# Altium PCB clock_controller.PcbDoc
Units mil, origin at the board's own origin, x right, y up, seen from the top; angles counter-clockwise.
Board outline 1506.14 x 1976.53 mil, 2 copper layers (Top Layer, Bottom Layer); 48 components, 34 nets, 156 pads, 34 vias.
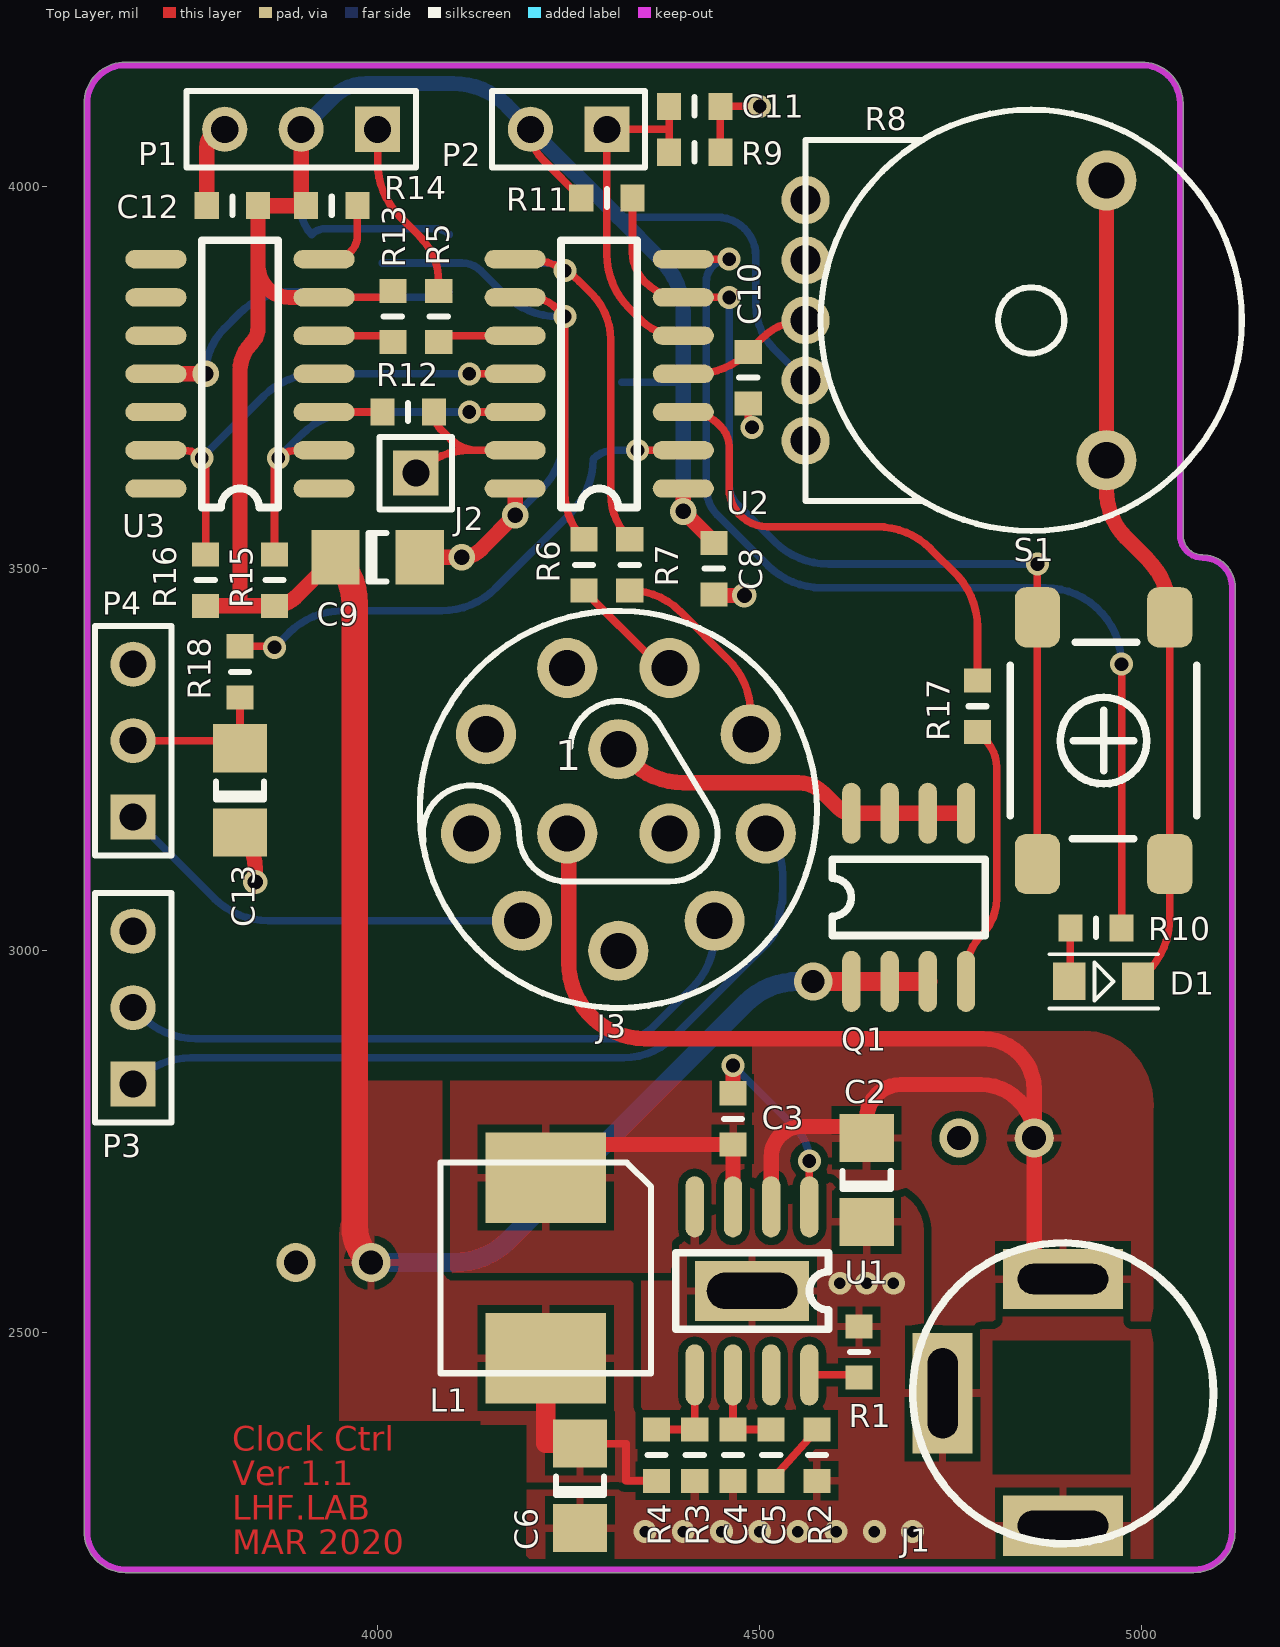
[diagram p0: Top Layer view]
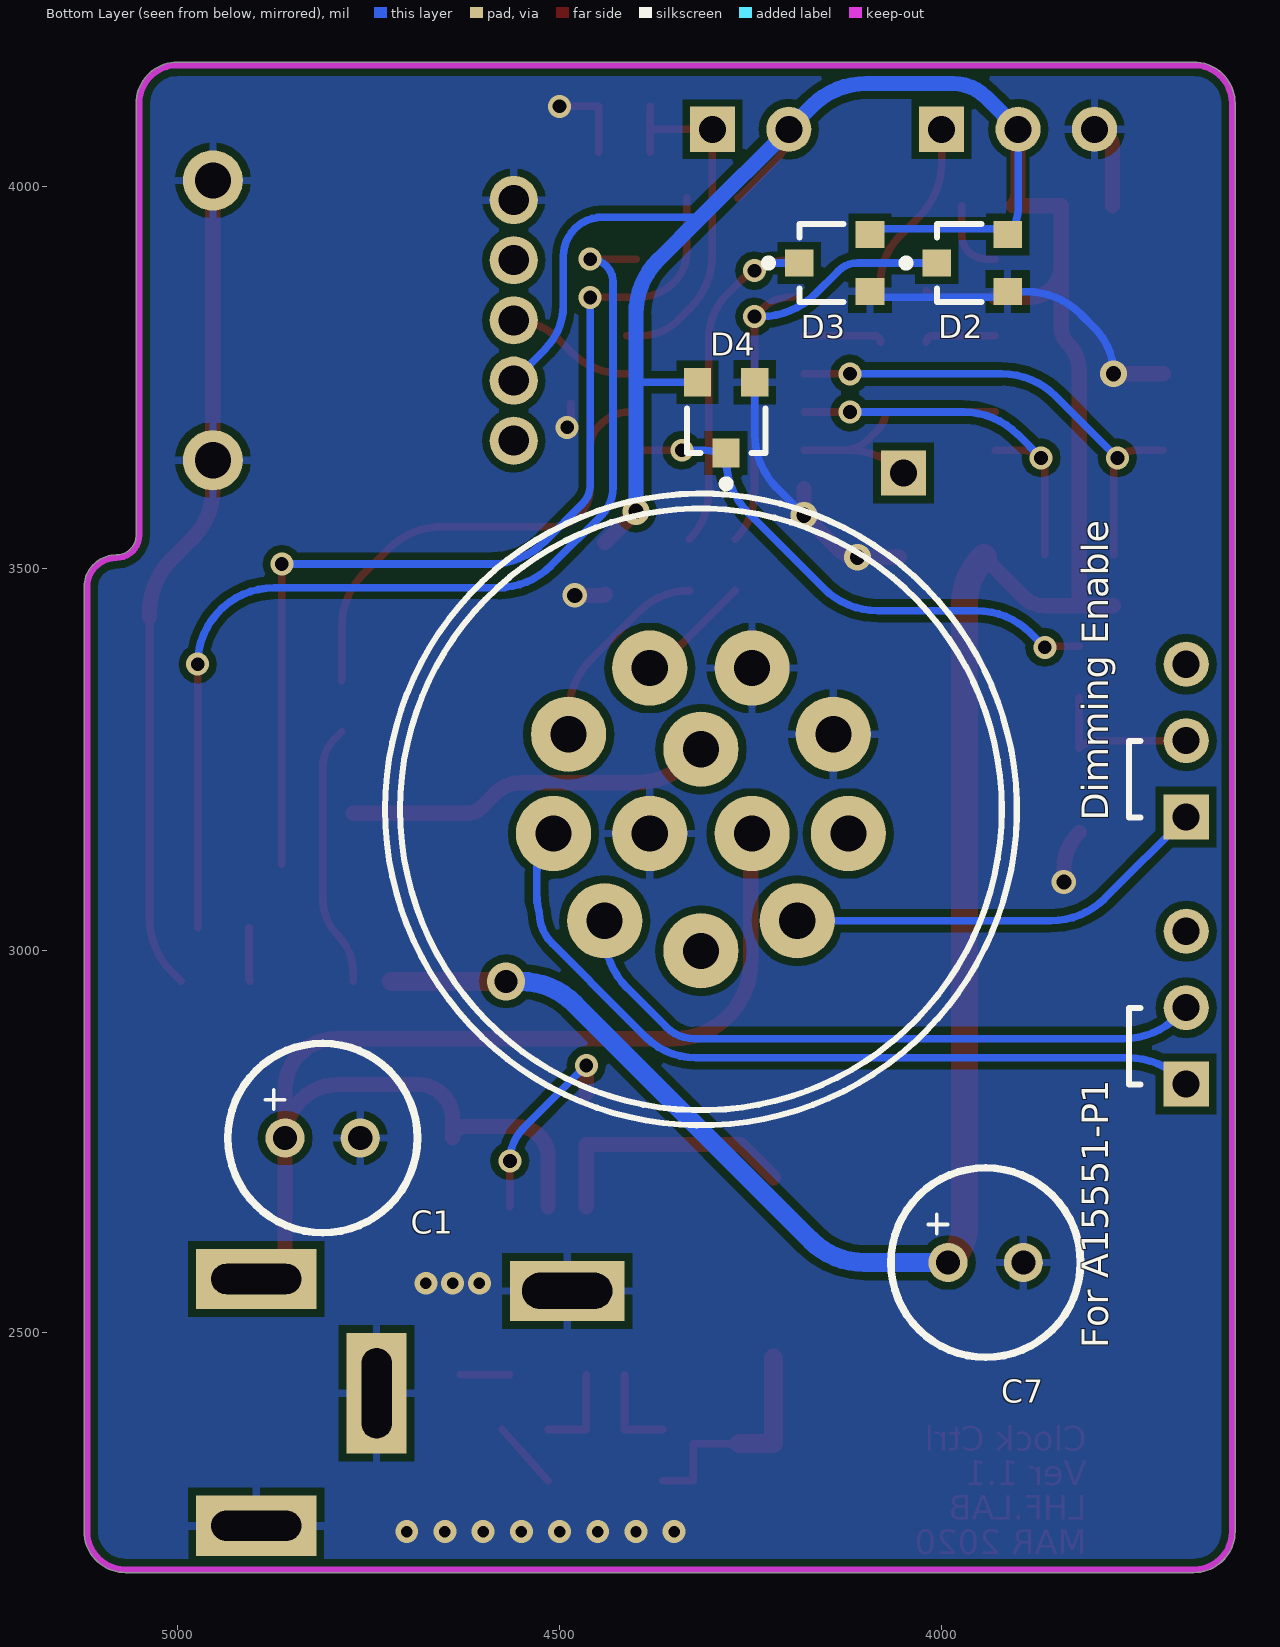
[diagram p1: Bottom Layer view, seen from below]

## Layer stack, top to bottom
Top Layer: signal copper 1.4
Dielectric: dielectric 12.6, FR-4, Dk 4.8
Bottom Layer: signal copper 1.4

## Board outline
3615.99,2240.35 cw(c3620,2240.35) 3616.14,2241.47 3616.14,4107.74 cw(c3620,4108.86) 3615.99,4108.86 cw(c3670,4108.86) 3670,4162.87 5000,4162.87 cw(c5000,4108.86) 5054.02,4108.86 5054.02,3544.06 ccw(c5080,3544.06) 5080,3518.07 cw(c5080,3475.94) 5122.13,3475.94 5122.13,2240.35 cw(c5068.11,2240.35) 5068.11,2186.34 3670,2186.34 cw(c3670,2240.35)

## Design rules (kind name [scope] priority, off if disabled: settings)
Clearance [All] p1: gap=10
HoleSize [All] p1: absolutevalues=TRUE maxlimit=200 minlimit=1 maxpercent=80.000 minpercent=20.000
MinimumSolderMaskSliver [All] p1: minsoldermaskwidth=5
PolygonConnect [All vs IsVia] p1: connectstyle=Direct reliefconductorwidth=10 reliefentries=4 polygonreliefangle="90 Angle"
PolygonConnect PolygonConnect_1 [All] p2: connectstyle=Relief reliefconductorwidth=10 reliefentries=4 polygonreliefangle="90 Angle"
RoutingVias [All] p1: holewidth=20 width=30 viastyle="Through Hole" minholewidth=14 minwidth=24 maxholewidth=100 maxwidth=100
SilkToSilkClearance [All] p1 off: silktosilkclearance=10
SilkscreenOverComponentPads [All] p1 off: minsilkscreentomaskgap=10
SolderMaskExpansion [All] p1: expansion=4
Width [All] p1: maxlimit=100 minlimit=6 preferedwidth=10 minimp=50.000000 maximp=50.000000 favimp=50.000000
24 further rules are at their usual default settings.

## Components (designator, comment, footprint, x,y, rotation, side; value= is the part's Value field where it differs from the comment)
C1 "100uF 35V" C6380POL 4810,2755 r180 bottom
C2 "10uF X5R 50V" C1206 4640,2700 r90 top
C3 "100nF" C0603 4465,2780 r270 top
C4 "1nF" C0603 4465,2340 r90 top
C5 "100nF" C0603 4515,2340 r270 top
C6 "10uF X5R 50V" C1206 4265,2300 r90 top
C7 "100uF 35V" C6380POL 3942.36,2592.05 r180 bottom
C8 "100nF" C0603 4440,3500 r270 top
C9 "10uF" C1206 4000,3515 r0 top
C10 "100nF" C0603 4485,3750 r90 top
C11 "100nF" C0603 4415,4105 r180 top
C12 "100nF" C0603 3810,3975 r180 top
C13 "10uF" C1206 3820,3210 r90 top
D1 "Yellow" LED0805 4905,2960 r0 top
D2 "BAV99" SOT23 3960,3900 r90 bottom
D3 "BAV99" SOT23 4140,3900 r90 bottom
D4 "BAV99" SOT23 4282,3697.68 r0 bottom
J1 "DC025" DC025M 4896.89,2420.95 r0 top
J2 "Socket" PIN1 4050,3625 r0 top
J3 "Connector" MS27034H12B12PN 4315,3185 r0 top locked
L1 "10uH 0630密封电感" Inductor0630 4220,2585 r270 top
P1 "Header 3" HDR1X3 4000,4075 r180 top
P2 "Light Sensor" HDR1X2 4300,4075 r180 top
P3 "Header 3" HDR1X3 3680,2825.61 r90 top
P4 "Header 3" HDR1X3 3680,3175 r90 top
Q1 "FDS6679" SO-8 4695,3070 r90 top
R1 "100K" R0603 4630,2475 r270 top
R2 "1K" R0603 4575,2340 r90 top
R3 "10K" R0603 4415,2340 r90 top
R4 "51K" R0603 4365,2340 r90 top
R5 "300R" R0603 4080,3830 r90 top
R6 "1K" R0603 4270,3505 r270 top
R7 "1K" R0603 4330,3505 r270 top
R8 "10K" RK10J 4560,3825 r270 top
R9 "10K" R0603 4415,4045 r0 top
R10 "1K" R0603 4940,3030 r180 top
R11 "10K" R0603 4300,3985 r180 top
R12 "300R" R0603 4040,3705 r180 top
R13 "1K" R0603 4020,3830 r270 top
R14 "1K" R0603 3940,3975 r0 top
R15 "4K7" R0603 3865,3485 r270 top
R16 "4K7" R0603 3775,3485 r270 top
R17 "1K" R0603 4785,3320 r270 top
R18 "1K" R0603 3820,3365 r90 top
S1 "SW-PB" BUTTON_SMT 4950,3275 r0 top
U1 "TPS54335" SO-8-THERMAL 4490,2555 r270 top
U2 "ATTiny214" SO-14 4400,3605 r180 top
U3 "RX8025" SO-14 3930,3605 r180 top

## Footprints (in the part's own frame and the unit in brackets; to place one, negate y for a bottom-side part, rotate by r counter-clockwise, add the part's x,y. Pads: shape width x height; smd on the part's side, far side on the other; paste and mask are expansions set on the pad)
BUTTON_SMT [mm]
  rrect50% 1.5x2 smd: 1(-2.2,-4.1) 1(-2.2,4.1) 2(2.2,-4.1) 2(2.2,4.1)
  silkscreen extent -3.1,-3.26 3.1,3.27, body extent -3.1,-3.5 3,3.5, height 7.5
C0603 [mm] "Chip Capacitor, Body 1.6x0.8mm, IPC High Density"
  rect 0.8x0.9 smd: 1(-0.852,0) 2(0.852,0)
  silkscreen extent 0,-0.3 0,0.3, body extent -1.03,-0.5 1.02,0.45, height 0.76
C1206 [mm] "Chip Capacitor; Body 3.2 x 1.6 mm (LxW typ)"
  rect 1.6x1.8 smd: 1(-1.4,0) 2(1.4,0)
  silkscreen extent -0.3,-0.8 0.3,0.8, body extent -1.52,-0.81 1.52,0.81, height 1.55
C6380POL [mm]
  round 1.3 hole 0.8: 1(-1.25,0) 2(1.25,0)
  silkscreen extent -3.15,-3.15 3.15,3.15, body extent -3.13,-3.14 3.15,3.14, height 8
DC025M [mm] "DC025M 2.1mm?"
  rect 4x2 hole 1 slot 3 at 0 deg: 1(0,3.8) 2(0,-4.4)
  rect 2x4 hole 1 slot 3 at 90 deg: 3(-4,0)
  silkscreen extent -5,-5 5,5, body extent -5.4,-5.4 5.4,5.4, height 15.1
HDR1X2 [mm] "Connector; Header; 2 Position"
  rect 1.5x1.5 hole 0.9: 1(0,0)
  round 1.5 hole 0.9: 2(2.54,0)
  silkscreen extent -1.27,-1.27 3.81,1.27
HDR1X3 [mm] "Connector; Header; 3 Position"
  rect 1.5x1.5 hole 0.9: 1(0,0)
  round 1.5 hole 0.9: 2(2.54,0) 3(5.08,0)
  silkscreen extent -1.27,-1.27 6.35,1.27
Inductor0630 [mm]
  rect 3x4 smd: 1(-3,0) 2(3,0)
  silkscreen extent -3.5,-3.5 3.5,3.5, body extent -3.8,-3.51 3.8,3.51, height 3
LED0805 [mm]
  rect 1.07x1.24 smd: 1(0,0) 2(2.286,0)
  silkscreen extent -0.66,-0.9 2.95,0.9
MS27034H12B12PN [mm]
  round 2 / inner round 2.5 / far side round 2.5 hole 1.2: 1(0,2) 2(1.7,-0.8) 3(-1.7,-0.8) 4(-4.4,2.5) 5(-1.7,4.7) 6(1.7,4.7) 7(4.4,2.5) 8(4.9,-0.8) 9(3.2,-3.7) 10(0,-4.7) 11(-3.2,-3.7) 12(-4.9,-0.8)
  silkscreen extent -6.6,-6.6 6.6,6.6
PIN1 [mm] "Connector; Plug"
  rect 1.5x1.5 hole 0.9: 1(0,0)
  silkscreen extent -1.2,-1.2 1.2,1.2
R0603 [mm] "Chip Resistor, Body 1.6x0.8mm, IPC High Density"
  rect 0.8x0.9 smd: 1(0.852,0) 2(-0.852,0)
  silkscreen extent 0,-0.3 0,0.3, body extent -1.03,-0.5 1.02,0.45, height 0.76
RK10J [mm]
  round 1.6 hole 1: 1(-4,0) 2(-2,0) 3(0,0) 4(2,0) 5(4,0)
  round 2 hole 1.2: 6(-4.65,10) 7(4.65,10)
  silkscreen extent -7,0 7,14.5
SO-8 [mil]
  oval 80x24 smd: 1(-110,75) 2(-110,25) 3(-110,-25) 4(-110,-75) 5(110,-75) 6(110,-25) 7(110,25) 8(110,75)
  silkscreen extent -50,-100 50,100, body extent -79,-98 79,98, height 67
SO-8-THERMAL [mil]
  rect 78.74x149.61 hole 47.24 slot 118.11 at 90 deg: 0(0,0)
  oval 80x24 smd: 1(-110,75) 2(-110,25) 3(-110,-25) 4(-110,-75) 5(110,-75) 6(110,-25) 7(110,25) 8(110,75)
  silkscreen extent -50,-100 50,100, body extent -79,-98 79,98, height 67
SO-14 [mil]
  oval 80x24 smd: 1(0,0) 2(0,-50) 3(0,-100) 4(0,-150) 5(0,-200) 6(0,-250) 7(0,-300) 8(220,-300) 9(220,-250) 10(220,-200) 11(220,-150) 12(220,-100) 13(220,-50) 14(220,0)
  silkscreen extent 60,-325 160,25, body extent 21,-336 191,34, height 104
SOT23 [mm]
  rect 0.9x0.95 smd: 1(0,1.175) 2(0.95,-1.175) 3(-0.95,-1.175)
  silkscreen extent -1.3,-0.3 1.3,2.33

## Part data
C1 C7: library part "Cap Pol2", "Polarized Capacitor (Axial)"
C2 C3 C4 C5 C6 C8 C9 C10 C11 C12 C13: library part Cap, "Capacitor"
D1: library part LED0, "Typical INFRARED GaAs LED"
D2 D3 D4: "SOT23 Silicon Planar High-Speed Switching Series Diode Pair"
J1: "CON,PWR2.5 DC025M 2.1mmо"
J3: library part CON_MS27034H12B12PN
L1: library part Inductor, "Inductor"
P1 P3 P4: "Header, 3-Pin"
P2: library part "Header 2", "Header, 2-Pin"
R1 R2 R3 R4 R5 R6 R7 R9 R10 R11 R12 R13 R14 R15 R16 R17 R18: library part Res2, "Resistor"
R8: library part RK10J, "Square Trimming Potentiometer"
S1: "Switch"
U3: library part RX8025T

## Via types
v1: diameter 30, hole 18, Top Layer to Bottom Layer, tented both sides, 16 vias
v2: diameter 30, hole 15, Top Layer to Bottom Layer, tented both sides, 11 vias
v3: diameter 35, hole 20, Top Layer to Bottom Layer, tented both sides, 4 vias
v4: diameter 32, hole 20, Top Layer to Bottom Layer, tented both sides, 2 vias
v5: diameter 50, hole 30, Top Layer to Bottom Layer, tented both sides, 1 vias

## Nets (pads, with @x,y where several pads share a name; then routed paths per layer and width w, separated by ;. In a path a pad name is that pad's centre, name@x,y a point inside that pad or via, vN(x,y) a via of type N, cw(c..) or ccw(c..) an arc to the next point about the centre after c; other vN are vias at no path point)
AIN1: C10.2 R8.3 U2.4 | length 181.3
  Top Layer w10: U2.4 4416.09,3755 ccw(c4416.09,3852.45) C10.2 4502.74,3801.28 cw(c4560,3744.02) R8.3
AIN2: C11.2 P2.1 R9.2 U2.5 | length 477.9
  Top Layer w10: R9.2@4381.46,4045.02 4381.46,4075 ; C11.2 4381.46,4075 ; U2.5@4411.72,3805 U2.5 4393.28,3805 cw(c4393.28,3873.28) 4345,3825 4329.29,3840.71 cw(c4400,3911.42) 4300,3911.42 P2.1 4381.46,4075
CHR_RELAY: J3.9 P3.2 | length 865.1
  Bottom Layer w10: P3.2 3691.32,2914.29 ccw(c3762.03,2985) 3762.03,2885 4323.79,2885 ccw(c4323.79,2936.21) 4359.99,2899.99 4411.69,2951.7 ccw(c4340.98,3022.41) 4440.98,3022.41 J3.9
CHR_SW: J3.8 P3.1 | length 1068.2
  Bottom Layer w10: P3.1 3685.1,2830.71 cw(c3755.81,2760) 3755.81,2860 4321.72,2860 ccw(c4321.72,2952.43) 4387.07,2887.07 4410,2910 4509.59,3009.59 ccw(c4468.88,3050.3) 4526.45,3050.3 ccw(c4439.39,3074.86) 4529.85,3074.86 ccw(c4445.32,3079.88) 4530,3079.88 ; J3.8 cw(c4454.59,3100.18) 4530,3100.18 4530,3079.88 ; 4530,3063.86 4530,3079.88
DIMMING: J3.11 P4.1 | length 560.9
  Bottom Layer w10: P4.1 3786.38,3068.62 ccw(c3857.09,3139.33) 3857.09,3039.33 J3.11
F_32768: J2.1 R12.2 U2.13 | length 218.7
  Top Layer w10: J2.1@4050.71,3625.71 cw(c4121.42,3555) 4121.42,3655 4130,3655 ; R12.2 ccw(c4106.29,3705) 4083.15,3681.85 4095.86,3669.14 ccw(c4130,3703.28) 4130,3655 ; U2.13 4130,3655
GND: C1.2 C2.1 C4.1 C6.1 C7.2 C8.2 C9.2 C10.1 C11.1 C12.2 C13.1 D1.2 D2.3 D3.3 D4.3 J1.2 J1.3 J3.2 J3.4 J3.5 P1.3 R1.2 R2.2 R3.2 R8.1 R8.6 R8.7 R9.1 S1.2 U1.0 U1.4 U2.14 U3.11 | length 2277.9
  Top Layer w10: R9.1 4448.54,4104.98 v1(4500,4105) ; C10.1 4485,3697.07 ccw(c4502.07,3697.07) v1(4490,3685) ; D1.2 5007.32,2972.32 ccw(c4936.61,3043.04) 5036.61,3043.04 5036.61,3113.58 S1.2@5036.61,3436.42
  Top Layer w20: U3.11 v3(3775,3755) ; C12.2 3776.46,4051.46 cw(c3800,4051.46) P1.3 ; C13.1 cw(c3771.72,3106.6) 3840,3106.6 v4(3840,3090) ; C9.2 v3(4110,3515) ccw(c4110,3551.21) 4135.61,3525.61 v3(4180,3570) U2.14 ; C8.2 ccw(c4443.52,3469.97) 4443.52,3465 v4(4480,3465) ; R8.6 R8.7 4953.7,3603.49 ccw(c5043.49,3603.49) 4980,3540 5007.32,3512.68 cw(c4936.61,3441.96) 5036.61,3441.96 S1.2@5036.61,3436.42
  Bottom Layer w10: v3(3775,3755) cw(c3859.5,3755) 3799.75,3814.75 3818.31,3833.31 cw(c3889.02,3762.6) 3889.02,3862.6 D2.3 ccw(c3932.08,3880.94) 3932.08,3855 4075.4,3855 ccw(c4075.4,3880.94) D3.3 ; v3(4180,3570) 4215.31,3605.31 ccw(c4144.6,3676.02) 4244.6,3676.02 D4.3
  other v2: 4350,2240 4400,2240 4450,2240 4500,2240 4550,2240 4600,2240 4650,2240 4700,2240 4605,2565 4640,2565 4675,2565
KEY: R11.2 S1.1 U2.6 | length 1323.4
  Top Layer w10: R11.2 4333.56,3914.69 ccw(c4389.69,3914.69) 4350,3875 ccw(c4398.28,3923.28) 4398.28,3855 U2.6 ; U2.6@4393.28,3855 U2.6 ; v1(4460,3855) U2.6 ; S1.1@4863.39,3113.58 4863.39,3436.42 v1(4863.39,3506.1)
  Bottom Layer w10: v1(4460,3855) 4460,3609.14 ccw(c4494.14,3609.14) 4470,3585 4519.61,3535.39 ccw(c4590.32,3606.1) 4590.32,3506.1 v1(4863.39,3506.1)
LAMP+: J3.1 Q1.5 Q1.6 Q1.7 Q1.8 | length 482.3
  Top Layer w20: J3.1 4329.45,3249.29 ccw(c4400.16,3320) 4400.16,3220 4550,3220 cw(c4550,3171.72) 4584.14,3205.86 4602.93,3187.07 ccw(c4620,3204.14) Q1.8 Q1.6 Q1.5
LED: R10.2 U2.7 | length 1381.8
  Top Layer w10: U2.7 v1(4460,3905) ; R10.2 v1(4973.56,3375.02)
  Bottom Layer w10: v1(4460,3905) ccw(c4460,3875) 4430,3875 4430,3606.21 ccw(c4481.21,3606.21) 4444.99,3570.01 4510.71,3504.29 ccw(c4581.42,3575) 4581.42,3475 4586.42,3475 4873.58,3475 cw(c4873.58,3375.02) v1(4973.56,3375.02)
NetC3_1: C3.1 U1.1 | length 260.3
  Top Layer w10: U1.1 v1(4565,2725)
  Top Layer w20: C3.1 v1(4465,2850)
  Bottom Layer w10: v1(4465,2850) 4547.32,2767.68 cw(c4504.64,2725) 4556.5,2755.89 cw(c4504.64,2725) v1(4565,2725)
NetC3_2: C3.2 L1.1 U1.3 | length 344.4
  Top Layer w20: L1.1 4263.35,2746.46 C3.2 U1.3
NetC4_2: C4.2 C5.1 U1.6 | length 121.5
  Top Layer w10: U1.6 C4.2 C5.1@4514.98,2373.54
NetC5_2: C5.2 R2.1 | length 90
  Top Layer w10: C5.2 R2.1
NetC13_2: C13.2 P4.2 R18.2 | length 209
  Top Layer w10: P4.2 3796.14,3275 cw(c3796.14,3241.26) C13.2 R18.2
NetD1_1: D1.1 R10.1 | length 70.4
  Top Layer w10: D1.1 ccw(c4901.48,2963.52) 4906.46,2963.52 R10.1
NetQ1_4: Q1.4 R17.1 | length 345.3
  Top Layer w10: Q1.4 4770,2971.72 cw(c4838.28,2971.72) 4790,3020 ccw(c4741.72,3068.28) 4810,3068.28 4810,3240 ccw(c4758.2,3240) 4794.83,3276.63 R17.1
NetR1_1: R1.1 U1.8 | length 65
  Top Layer w10: U1.8 R1.1@4630,2445
NetR3_1: R3.1 R4.1 U1.5 | length 121.5
  Top Layer w10: R4.1 R3.1 U1.5
NetR5_2: R5.2 U2.10 | length 104.9
  Top Layer w10: R5.2 cw(c4088.56,3796.44) 4088.56,3805 U2.10
NetR12_1: R12.1 U3.3 | length 76.5
  Top Layer w10: U3.3 R12.1
NetR13_1: R13.1 U3.5 | length 94.9
  Top Layer w10: U3.5 4011.46,3805 cw(c4011.46,3796.46) R13.1
NetR14_1: R14.1 U3.7 | length 100
  Top Layer w10: U3.7 3940.86,3905 ccw(c3940.86,3939.14) 3965,3915 ccw(c3944.37,3935.63) 3973.54,3935.63 R14.1
PHA: J3.6 R6.1 | length 189
  Top Layer w10: R6.1 J3.6@4363.98,3377.47 ; J3.6@4367.28,3376.11 ccw(c4381.93,3390.75) J3.6 ; J3.6@4363.98,3377.47 ccw(c4381.93,3395.42) J3.6 ; J3.6@4363.98,3377.47 ccw(c4381.93,3395.42) J3.6
PHB: J3.7 R7.1 | length 267.8
  Top Layer w10: R7.1 cw(c4330,3378.4) 4395.8,3444.2 4458.94,3381.06 cw(c4388.23,3310.35) 4488.23,3310.35 J3.7
PROT1: D2.1 R6.2 U2.9 | length 611
  Top Layer w10: U2.9@4195,3855 U2.9@4198.79,3855 ; U2.9@4201.72,3855 U2.9@4198.79,3855 ; R6.2 cw(c4330.36,3598.91) 4245,3598.91 4245,3815.86 ccw(c4210.86,3815.86) 4235,3840 ccw(c4198.79,3803.79) U2.9@4198.79,3855
  Bottom Layer w10: D2.1 4110,3900 cw(c4110,3863.79) 4135.61,3889.39 4165.71,3859.29 ccw(c4236.42,3930) v1@4236.42,3830
  other v1: 4245,3830
PROT2: D3.1 R7.2 U2.8 | length 507.9
  Top Layer w10: U2.8@4193.58,3905 cw(c4193.58,3805) 4264.29,3875.71 4280,3860 cw(c4219.64,3799.64) 4305,3799.64 4305,3598.91 ccw(c4390.36,3598.91) R7.2
  Bottom Layer w10: D3.1 4220.86,3900 cw(c4220.86,3865.86) v1(4245,3890) ; D3.1@4188.58,3908.85 D3.1@4199.49,3908.85
PWM_DIMMING: D4.1 R18.1 U2.2 | length 696.9
  Top Layer w10: R18.1 3861.48,3398.54 cw(c3861.48,3393.57) v1(3865,3397.09) ; v1(4340,3655) U2.2
  Bottom Layer w10: v1(3865,3397.09) 3883.62,3415.71 cw(c3954.33,3345) 3954.33,3445 4083.58,3445 ccw(c4083.58,3545) 4154.29,3474.29 4252.71,3572.71 ccw(c4182,3643.42) 4282,3643.42 cw(c4309.95,3615.47) 4309.95,3655 v1(4340,3655)
PWM_LIGHT: R17.2 U2.3 | length 632.2
  Top Layer w10: U2.3 4408.79,3705 cw(c4408.79,3653.79) 4444.99,3690.01 4449.39,3685.61 cw(c4423.79,3660) 4460,3660 4460,3605 ccw(c4510,3605) 4510,3555 4653.32,3555 cw(c4653.32,3455) 4724.03,3525.71 4759.86,3489.88 cw(c4685,3423.58) 4785,3423.58 R17.2
SCL: R15.2 U2.12 U3.2 | length 521
  Top Layer w10: R15.2 3865,3632.93 cw(c3882.07,3632.93) v1(3870,3645) cw(c3894.14,3620.86) 3894.14,3655 U3.2 ; v1(4120,3705) U2.12
  Bottom Layer w10: v1(3870,3645) 3900.71,3675.71 cw(c3971.42,3605) 3971.42,3705 v1(4120,3705)
SDA: R16.2 U2.11 U3.13 | length 641.7
  Top Layer w10: U3.13 3745.86,3655 cw(c3745.86,3620.86) v1(3770,3645) cw(c3757.93,3632.93) 3775,3632.93 R16.2 ; v1(4120,3755) U2.11
  Bottom Layer w10: v1(3770,3645) 3850.71,3725.71 cw(c3921.42,3655) 3921.42,3755 v1(4120,3755)
UPDI: P1.1 R5.1 | length 236.6
  Top Layer w10: P1.1 4000,4031.42 ccw(c4100,4031.42) 4029.29,3960.71 4055,3935 cw(c3994.64,3874.64) 4080,3874.64 R5.1
VCC: C6.2 C7.1 C8.1 C9.1 C12.1 D2.2 D3.2 D4.2 L1.2 P1.2 P2.2 Q1.1 Q1.2 Q1.3 R4.2 R8.4 R11.1 R13.2 R14.2 R15.1 R16.1 U2.1 U3.6 | length 5141.5
  Top Layer w10: U3.6 3999.34,3855 ccw(c3999.34,3884.22) R13.2 ; P2.2 ccw(c4256.84,4075) 4216.65,4034.81 R11.1 ; C6.2 4325,2355.12 4325,2306.44 R4.2
  Top Layer w20: R16.1 3820,3451.46 ; P1.2 3900,3990.55 ccw(c3921.99,3990.55) R14.2 C12.1 3843.56,3896.44 ; U3.6 3885,3855 cw(c3885,3896.44) 3843.56,3896.44 ; C9.1 3892.89,3463.01 cw(c3865,3490.9) R15.1 3820,3451.46 ; U2.1 v3(4400,3575) C8.1@4440.72,3534.28 ; 3820,3451.46 3820,3758.79 cw(c3871.21,3758.79) 3835,3795 ccw(c3814.34,3815.66) 3843.56,3815.66 3843.56,3896.44
  Top Layer w25: L1.2 4220,2355.12 C6.2 ; v5(4570,2960) Q1.1 Q1.2 Q1.3
  Top Layer w35: C9.1 cw(c3884.15,3454.27) 3970,3454.27 3970,2640 ccw(c4033.7,2640) 3988.66,2594.96 C7.1
  Bottom Layer w10: P1.2 3900,3970.57 ccw(c3946.91,3970.57) D2.2 cw(c3932.08,3919.06) 3932.08,3945 4075.4,3945 cw(c4075.4,3919.06) D3.2 ; 4315,3960 4443.79,3960 cw(c4443.79,3908.79) 4480,3945 cw(c4443.79,3908.79) 4495,3908.79 4495,3845 ccw(c4576.46,3845) 4518.86,3787.4 R8.4 ; D4.2 4397.43,3743.94 ccw(c4397.43,3751.87) 4400,3744.36 ccw(c4397.43,3751.87) 4403.04,3746.26
  Bottom Layer w20: P1.2@3900,4082.93 P1.2 3942.08,4117.08 cw(c3985,4074.16) 3985,4134.86 4098.72,4134.86 cw(c4098.72,4034.86) 4169.43,4105.57 P2.2 4315,3960 4370.71,3904.29 cw(c4300,3833.58) 4400,3833.58 4400,3744.36 v3(4400,3575)
  Bottom Layer w25: C7.1 4100.62,2592.05 ccw(c4100.62,2692.05) 4171.34,2621.34 4480.71,2930.71 cw(c4551.42,2860) 4551.42,2960 v5(4570,2960)
VIN: C1.1 C2.2 J1.1 J3.3 U1.2 | length 1678.6
  Top Layer w20: J3.3 cw(c4243.41,3148.85) 4250,3148.85 4250,2985 ccw(c4350,2985) 4350,2885 4791.72,2885 cw(c4791.72,2816.72) 4840,2865 cw(c4793.62,2818.62) 4859.21,2818.62 C1.1 ; U1.2 4515,2730 cw(c4555,2730) 4555,2770 4625.12,2770 cw(c4625.12,2755.12) C2.2 4640,2780 cw(c4685,2780) 4685,2825 4789.21,2825 cw(c4789.21,2755) C1.1 ; J1.1@4896.89,2565.55 cw(c4896.89,2603.23) 4859.21,2603.23 C1.1
pads on no net: J3.10 J3.12 P3.3 P4.3 R8.2 R8.5 U1.7 U3.1 U3.4 U3.8 U3.9 U3.10 U3.12 U3.14

## Polygon pours and split planes (outlines as drawn)
VCC on Top Layer "Top Layer-VCC" (solid, remove dead copper, pour order 33): 4095,2830 3975,2830 3975,2689.14 cw(c3940.86,2689.14) 3965,2665 ccw(c4001.21,2628.79) 3950,2628.79 3950,2535 3950,2380 4105,2380 4185,2380 4190,2380 4195,2380 4195,2294.5 4195,2291.15 4337.28,2291.15 4340,2291.15 4340,2345 4340,2830 4335,2830
GND on Top Layer "Top Layer-GND" (solid, remove dead copper, pour order 31): 4304.97,2294.8 4304.97,2294.5 4195,2294.5 4195,2190.35 cw(c4199.65,2190.35) 4199.65,2195 5015,2195 5015,2708.84 ccw(c5013.84,2708.84) 5013.84,2710 4345,2710 4345,2415 4345,2300 ccw(c4350,2300) 4350,2295
NetC3_2 on Top Layer "Top Layer-NetC3_2" (solid, remove dead copper, pour order 24): 4394.22,2578.71 4098.12,2578.71 cw(c4098.12,2583.12) 4095,2580 4095,2690 4095,2830 4490,2830 4490,2580
VIN on Top Layer "Top Layer-VIN" (solid, remove dead copper, pour order 20): 4690.04,2504.69 5014.88,2504.69 5015,2504.8 5015,2790 5015,2798.58 ccw(c4915,2798.58) 4985.71,2869.29 4985,2870 ccw(c4924.64,2809.64) 4924.64,2895 4755,2895 4495,2895 4490,2895 4490,2505
GND on Bottom Layer "Bottom Layer-GND" (solid, remove dead copper, pour order 35): 3620,4010 3620,4158.86 3725,4158.86 5118.11,4158.86 5118.11,2285 5118.11,2190.35 3750,2190.35 3620,2190.35 3620,2340

## Keep-outs
Keep-Out Layer:
  lines w8: 3620,2240.35 ccw(c3670,2240.35) 3670,2190.35 5068.11,2190.35 ccw(c5068.11,2240.35) 5118.11,2240.35 5118.11,3475.94 ccw(c5080,3475.94) 5080,3514.06 cw(c5080,3544.06) 5050,3544.06 5050,3960 ; 3620,4108.86 cw(c3670,4108.86) 3670,4158.86 5000,4158.86 cw(c5000,4108.86) 5050,4108.86 5050,3940 ; 3620.16,2240.35 3620.16,4108.86

## Other copper
Top Layer:
  pour cut-out: 4805,2490 4805,2315 4985,2315 4985,2490
  text "Clock Ctrl" at 3810,2335 h55
  text "Ver 1.1" at 3810,2290 h55
  text "LHF.LAB" at 3810,2245 h55
  text "MAR 2020" at 3810,2200 h55

## Silkscreen, mask and mechanical layers (free items; w line width, h text height)
Bottom Overlay:
  lines w8: 3740,2825 3755,2825 3755,2925 3740,2925 ; 3740,3174.39 3755,3174.39 3755,3274.39 3740,3274.39
  text "Dimming Enable" at 3770,3170 h60 r270
  text "For A15551-P1" at 3770,2480 h60 r270
Top Solder:
  text "Clock Ctrl" at 3810,2335 h55
  text "Ver 1.0" at 3810,2290 h55
  text "LHF.LAB" at 3810,2245 h55
  text "MAR 2020" at 3810,2200 h55

## Text inside footprints (layer, text, board x,y; h text height)
J3: Top Overlay "1" at 4232.32,3236.18 h39.37